# Altium PCB STM32F1_board.PcbDoc
Units mil, origin at the board's own origin, x right, y up, seen from the top; angles counter-clockwise.
Board outline 6000 x 4000 mil, 2 copper layers (Top Layer, Bottom Layer); 43 components, 49 nets, 160 pads, 20 vias.
Unrouted connection lines stored in the file: 82.
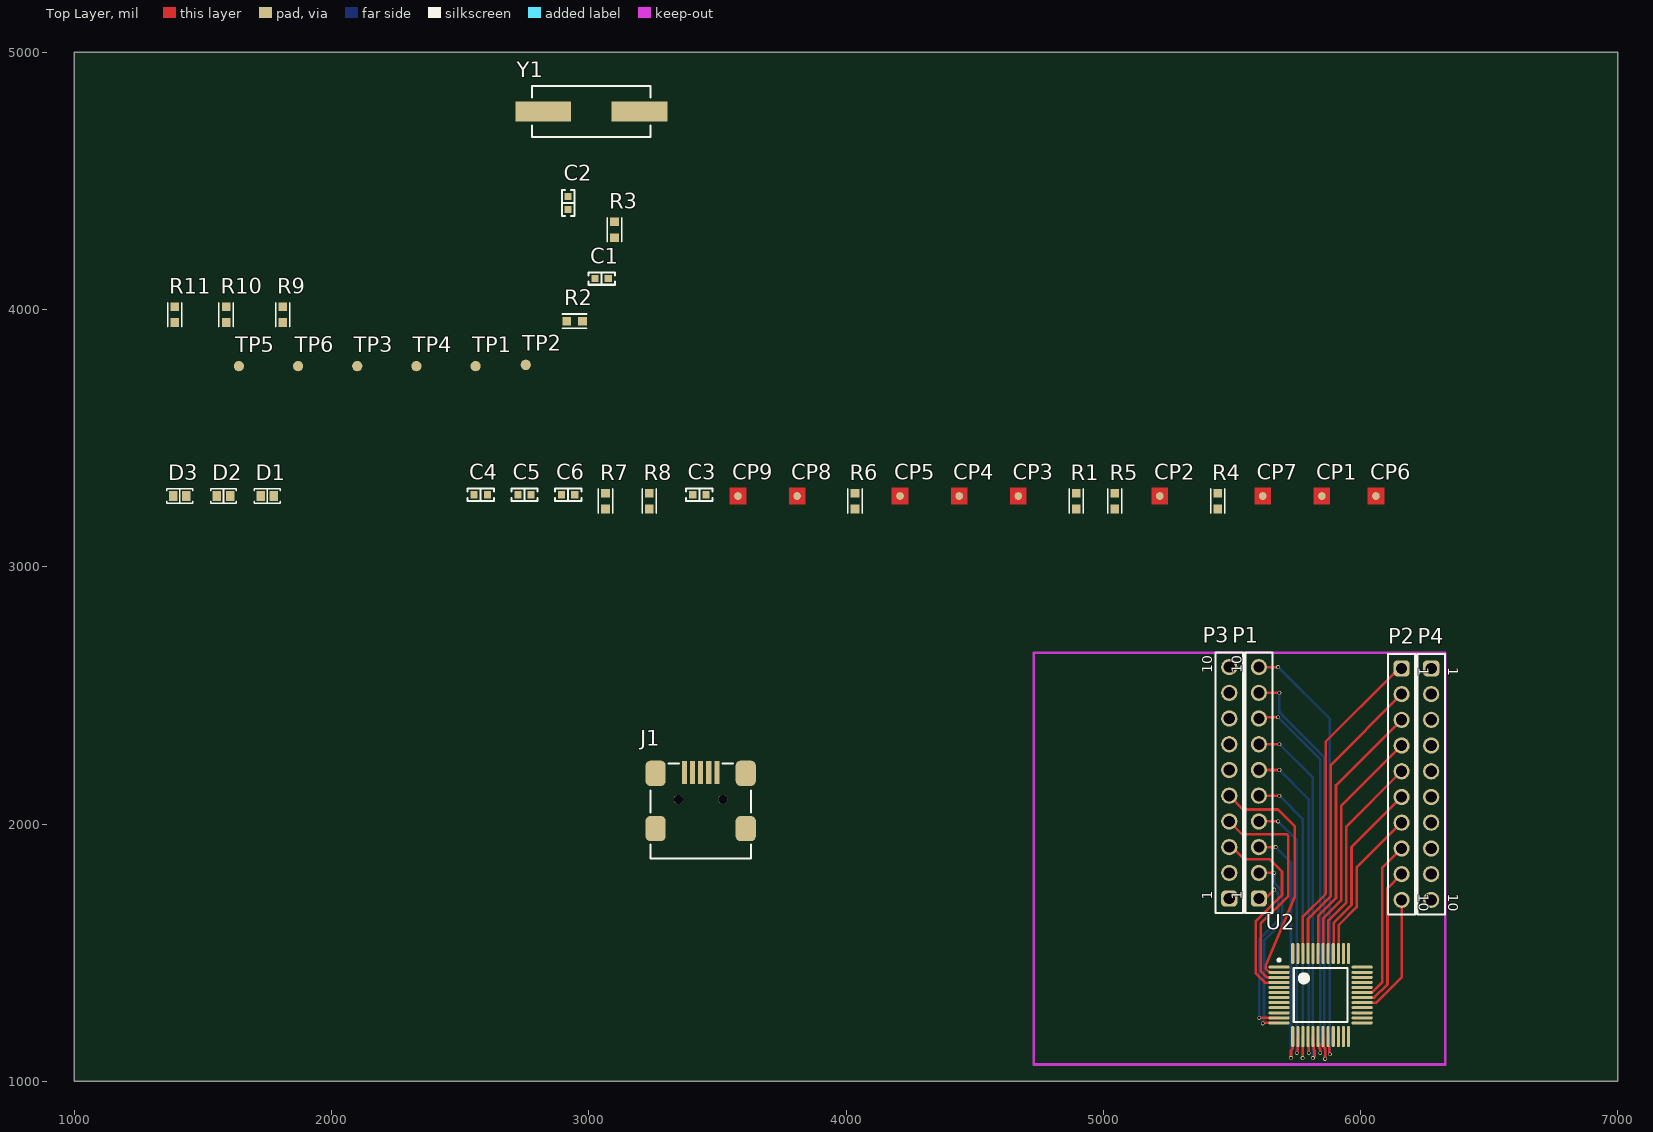
[diagram p0: Top Layer view]
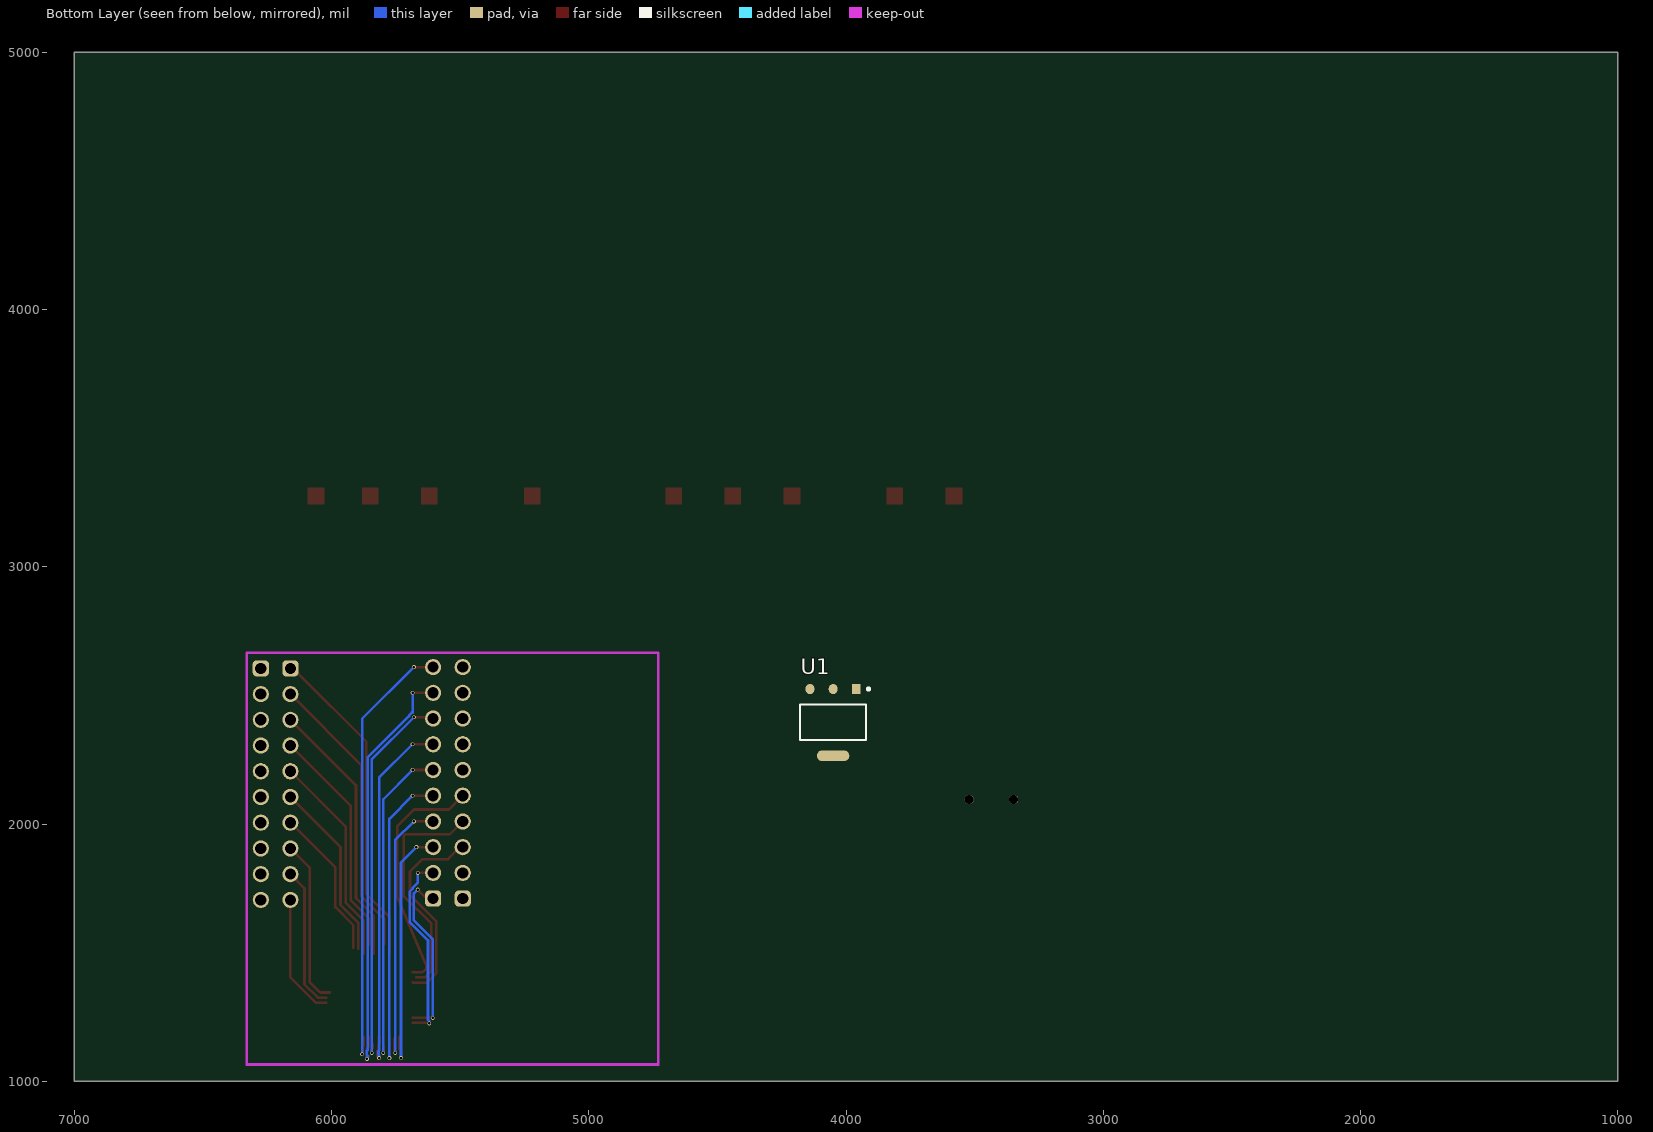
[diagram p1: Bottom Layer view, seen from below]

## Layer stack, top to bottom
Top Solder: solder mask 0.4, Solder Resist, Dk 3.5
Top Layer: signal copper 1.4
Dielectric 1: dielectric 12.6, FR-4, Dk 4.8
Bottom Layer: signal copper 1.4
Bottom Solder: solder mask 0.4, Solder Resist, Dk 3.5

## Board outline
1000,1000 7000,1000 7000,5000 1000,5000

## Design rules (kind name [scope] priority, off if disabled: settings)
Clearance [All] p1: gap=10 ignorepadtopadclearanceinfootprint=FALSE except(0: Arc-Hole Track-Hole SMDPad-Hole THPad-Hole Via-Hole Fill-Hole Poly-Hole Region-Hole Text-Hole; 5: Arc-SMDPad Track-SMDPad SMDPad-SMDPad; 6: Arc-Arc Arc-Track Arc-Via Arc-GluePoints Track-Track Track-Via Track-GluePoints Via-GluePoints)
PolygonConnect [All] p1: connectstyle=Relief reliefconductorwidth=10 reliefentries=4 polygonreliefangle="90 Angle" airgapwidth=10
RoutingVias [All] p1: holewidth=28 width=50 viastyle="Through Hole" minholewidth=28 minwidth=50 maxholewidth=28 maxwidth=50
SolderMaskExpansion [All] p1: expansion=4 istentingtop=FALSE
Width [All] p1: maxlimit=50 minlimit=5 preferedwidth=10 minimp=50.000000 maximp=50.000000 favimp=50.000000
30 further rules are at their usual default settings.

## Components (designator, comment, footprint, x,y, rotation, side; value= is the part's Value field where it differs from the comment)
C1 "Capacitor" "CAP FILM 0603_1608" 3050,4120 r180 top value=10pF
C2 "Capacitor" "CAP FILM 0603_1608" 2920,4414.41 r90 top value=10pF
C3 "=VALUE" "CAP FILM 0603_1608" 3430,3280 r0 top
C4 "10uF" "CAP FILM 0603_1608" 2580,3280 r0 top
C5 "100nF" "CAP FILM 0603_1608" 2750,3280 r0 top
C6 "100nF" "CAP FILM 0603_1608" 2920,3280 r0 top
CP1 "CONNECT_PAD" PAD_SQUARE 5850,3275 r0 top
CP2 "CONNECT_PAD" PAD_SQUARE 5220,3275 r90 top
CP3 "CONNECT_PAD" PAD_SQUARE 4670,3275 r90 top
CP4 "CONNECT_PAD" PAD_SQUARE 4440,3275 r90 top
CP5 "CONNECT_PAD" PAD_SQUARE 4210,3275 r90 top
CP6 "CONNECT_PAD" PAD_SQUARE 6060,3275 r90 top
CP7 "CONNECT_PAD" PAD_SQUARE 5620,3275 r90 top
CP8 "CONNECT_PAD" PAD_SQUARE 3810,3275 r90 top
CP9 "CONNECT_PAD" PAD_SQUARE 3580,3275 r90 top
D1 "=VALUE" "RES 0603_1608" 1750,3275 r0 top
D2 "=VALUE" "RES 0603_1608" 1580,3275 r0 top
D3 "=VALUE" "RES 0603_1608" 1410,3275 r0 top
J1 "USB Micro" "FCI USB 10033526-N3212LF" 3435,2050 r180 top
P1 "61301011121" 61301011121 5605,2160 r90 top
P2 "61301011121" 61301011121 6160,2155 r270 top
P3 "61301011121" 61301011121 5490,2160 r90 top
P4 "61301011121" 61301011121 6275,2155 r270 top
R1 "Resistor" SMD-0603-RES 4895,3255 r0 top value=1K5
R2 "Resistor" SMD-0603-RES 2945,3955 r90 top value=1M
R3 "Resistor" SMD-0603-RES 3100,4310 r0 top value=2K
R4 "10K" SMD-0603-RES 5445,3255 r0 top
R5 "10K" SMD-0603-RES 5045,3255 r0 top
R6 "10K" SMD-0603-RES 4035,3255 r0 top
R7 "100K" SMD-0603-RES 3065,3255 r0 top
R8 "100K" SMD-0603-RES 3235,3255 r0 top
R9 "150R" SMD-0603-RES 1810,3980 r0 top
R10 "470R" SMD-0603-RES 1590,3980 r0 top
R11 "150R" SMD-0603-RES 1390,3980 r0 top
TP1 "=Value" PCBComponent_1 2560,3780 r90 top
TP2 "=Value" PCBComponent_1 2755,3785 r90 top
TP3 "=Value" PCBComponent_1 2100,3780 r90 top
TP4 "=Value" PCBComponent_1 2330,3780 r90 top
TP5 "=Value" PCBComponent_1 1640,3780 r90 top
TP6 "=Value" PCBComponent_1 1870,3780 r90 top
U1 "AMS1117-3.3" FP-AMS1117-IPC_C 4050,2395 r270 bottom
U2 "STM32F103C6T6A" STM-LQFP48_M 5845,1335 r0 top
Y1 "FOXSDLF/080-20" FOX-HC49SDLF_V 3010,4770 r180 top

## Footprints (in the part's own frame and the unit in brackets; to place one, negate y for a bottom-side part, rotate by r counter-clockwise, add the part's x,y. Pads: shape width x height; smd on the part's side, far side on the other; paste and mask are expansions set on the pad)
61301011121 [mm] "Pin Header, pitch 2.54 mm, THT, Vertical, single row, 10p"
  rrect50% 1.6x1.6 hole 1.1: 1(-11.43,0)
  round 1.6 hole 1.1: 2(-8.89,0) 3(-6.35,0) 4(-3.81,0) 5(-1.27,0) 6(1.27,0) 7(3.81,0) 8(6.35,0) 9(8.89,0) 10(11.43,0)
  silkscreen extent -12.85,-1.34 12.85,1.34, body extent -12.7,-1.27 12.7,1.27, height 8.57
"CAP FILM 0603_1608" [mm] "Chip Capacitor, 2-Leads, Body 1.60x0.80mm, IPC Medium Density"
  rect 0.7x0.7 smd: 1(-0.65,0) 2(0.65,0)
  silkscreen extent -1.3,-0.6 1.3,0.6, body extent -0.8,-0.4 0.8,0.4, height 0.7
"FCI USB 10033526-N3212LF" [mm] "USB 2.0 Type B Mini"
  rect 0.5x2.25 smd: 1(1.6,-3.826) 2(0.8,-3.826) 3(0,-3.826) 4(-0.8,-3.826) 5(-1.6,-3.826)
  round 0.9 hole 0.9 unplated: M(-2.2,-1.151) M(2.2,-1.151)
  rrect50% 2x2.5 smd: S(-4.45,1.719) S(-4.45,-3.731) S(4.45,1.719) S(4.45,-3.731)
  silkscreen extent -4.95,-4.71 4.95,4.69, body extent -4.95,-4.7 4.95,4.7, height 4.01
FOX-HC49SDLF_V [mm] "SMD, 2-Leads, Body 5x11.7mm"
  rect 5.5x2 smd: 1(-4.75,0) 2(4.75,0)
  silkscreen extent -5.85,-2.5 5.85,2.5, body extent -6.15,-2.35 6.15,2.35, height 4.34
FP-AMS1117-IPC_C [mm]
  rect 1.004x0.872 smd paste+0 mask+0: 1(-3.295,2.29)
  rrect100% 1.004x0.872 smd paste+0 mask+0: 2(-3.295,0) 3(-3.295,-2.29)
  rrect87% 1.004x3.182 smd paste+0 mask+0: 4(3.295,0)
  silkscreen extent -3.42,-3.25 1.75,3.62, body extent -3.53,-3.25 3.53,3.25, height 1.8
PAD_SQUARE [mil]
  round 30 smd: 1(0,0)
  Top Layer region: -32.5,-32.5 32.5,-32.5 32.5,32.5 -32.5,32.5
PCBComponent_1 [mil]
  round 40 smd: 1(0,0)
"RES 0603_1608" [mm] "Chip Resistor, 2-Leads, Body 1.60x0.80mm, IPC Medium Density"
  rect 0.85x0.95 smd: 1(-0.65,0) 2(0.65,0)
  silkscreen extent -1.27,-0.7 1.27,0.7, body extent -0.8,-0.4 0.8,0.4, height 0.45
SMD-0603-RES [mm]
  rect 0.85x0.85 smd: 1(0,0.775) 2(0,-0.775)
  silkscreen extent -0.7,-1.2 0.7,1.2, body extent -0.4,-0.85 0.4,0.85, height 0.56
STM-LQFP48_M [mm] "QFP, 48-Leads, Body 7x7mm, Pitch 0.5mm, IPC Low Density"
  oval 2.1x0.3 smd: 1(-4.1,2.75) 2(-4.1,2.25) 3(-4.1,1.75) 4(-4.1,1.25) 5(-4.1,0.75) 6(-4.1,0.25) 7(-4.1,-0.25) 8(-4.1,-0.75) 9(-4.1,-1.25) 10(-4.1,-1.75) 11(-4.1,-2.25) 12(-4.1,-2.75) 25(4.1,-2.75) 26(4.1,-2.25) 27(4.1,-1.75) 28(4.1,-1.25) 29(4.1,-0.75) 30(4.1,-0.25) 31(4.1,0.25) 32(4.1,0.75) 33(4.1,1.25) 34(4.1,1.75) 35(4.1,2.25) 36(4.1,2.75)
  oval 0.3x2.1 smd: 13(-2.75,-4.1) 14(-2.25,-4.1) 15(-1.75,-4.1) 16(-1.25,-4.1) 17(-0.75,-4.1) 18(-0.25,-4.1) 19(0.25,-4.1) 20(0.75,-4.1) 21(1.25,-4.1) 22(1.75,-4.1) 23(2.25,-4.1) 24(2.75,-4.1) 37(2.75,4.1) 38(2.25,4.1) 39(1.75,4.1) 40(1.25,4.1) 41(0.75,4.1) 42(0.25,4.1) 43(-0.25,4.1) 44(-0.75,4.1) 45(-1.25,4.1) 46(-1.75,4.1) 47(-2.25,4.1) 48(-2.75,4.1)
  silkscreen extent -4.22,-2.65 2.65,3.57, body extent -3.5,-3.5 3.5,3.5, height 1.6

## Part data
C3 C4 C5 C6: library part Capacitor, "SMT Capacitor"
D1: library part LED, "orange"
D2: library part LED, "green"
D3: library part LED, "blue"
J1: library part "USB 2.0 Type B Micro"
P1 P2 P3 P4: library part CMP-1502-01082-4, Color=Black, Contact Resistance=20mΩ, Current Rating=3A, Flammability Rating="UL94 V-0", Insulation Resistance=1GΩ, Max Operating Temperature=105°C, Min Operating Temperature=-40°C, Operating Supply Voltage=250V, Connector Type="Male Pin", Contact Gender=Male, Contact Material=Copper, Contact Mating Length=5.9944mm, Contact Plating=Gold, Gender=Male, Height=8.74mm, Housing Material=PBT, Lead Pitch=2.54mm, Length=2.54mm, Mount="Through Hole", NexarPartId=18818159, Number of Contacts=10, Number of Pins=10, Number of Positions=10, Number of Rows=1, Orientation=Vertical, Packaging=Bulk, Pitch=2.54mm, REACH SVHC=Unknown, RoHS=Compliant, Termination=Solder, Voltage Rating=250V, Width=25.4mm
R4 R5 R6 R7 R8 R9 R10 R11: library part Resistor, "SMT Resistor"
TP1 TP2 TP3 TP4 TP5 TP6: library part TEST_PAD
U1: library part CMP-209535-000001-1, "LDO Voltage Regulators 1A, 3.3V", Dropout Voltage=1.1V, Manufacturer="Advanced Monolithic Systems", Max Junction Temp=+125°C, Max Power Dissipation=1.2W, Max Supply Voltage=15V, Nominal Supply Current=5mA, Output Current=1A, Output Voltage=3.3V, Package=AMS1117, Temperature="-40°C to +125°C", Temperature Range Low=-40°C, Automotive=No, Category=IC, ComponentLink2Description=Datasheet, ComponentLink2URL=http://www.advanced-monolithic.com/pdf/ds1117.pdf, Device Class L1="Integrated Circuits (ICs)", Device Class L2="Power Management ICs", Device Class L3="Voltage Regulators - Linear", Height=1.8mm, Ipc Land Pattern Name=SOT229P700X180-4, Lead Free=Yes, Manufacturer Part Number=AMS1117-3.3, Number Of Outputs=1, Octopart=https://octopart.com/ams1117-3.3-advanced+monolithic+systems-25899300, Output Type=Fixed, RoHS=TRUE, Standoff Height=0.64mm, Temperature Range High=+125°C
U2: library part CMP-0237-00254-3, "ARM Cortex-M3 32-bit MCU, 32 KB Flash, 10 KB Internal RAM, 37 I/Os, 48-pin LQFP, -40 to 85 degC, Tray", I/Os (High Current)=37, Operating Frequency(F) (Processor speed) (MHz)=72, Supply Voltage(Vcc) min (V)=2, A/D Converter="2x12-bit (10 Channel)", ComponentLink1Description="Manufacturer URL", ComponentLink1URL=http://www.st.com/web/en/home.html, ComponentLink2Description=Datasheet, ComponentLink2URL=http://www.st.com/st-web-ui/static/active/en/resource/technical/document/datasheet/CD00210843.pdf, ComponentLink3Description="Package Specification", ComponentLink3URL=http://www.st.com/st-web-ui/static/active/en/resource/technical/document/datasheet/DM00058181.pdf, Core="ARM Cortex-M3", DatasheetVersion="Rev. 6", FLASH Size (Prog) (kB)=32, Internal RAM Size (kB)=10, Mounting Technology="Surface Mount", PackageDescription="48-Pin Low Profile Quad Flat Package, 7 x 7 mm Body, 0.5 mm Pitch", PackageReference=LQFP48, PackageVersion="Rev. 6, 06/2013", Packing=Tray, PartNumber=STM32F103C6T6A
Y1: library part CMP-2100-03639-1, "Resistance Weld Crystal, 8 MHz, +/- 30 ppm, -20 to 70 degC, 2-Pin SMD, RoHS, Tape and Reel", Case/Package=SMD/SMT, ESR (Equivalent Series Resistance)=80Ohm, Frequency=8MHz, Frequency Stability=50ppm, Frequency Tolerance=30ppm, Load Capacitance=20pF, Manufacturer="FOX Electronics", Max Operating Temperature=70degC, Min Operating Temperature=-20degC, Package Description="2-Pin Surface Mount Device, Body 5 x 11.7 mm", Package Quantity=1000, Package Reference=HC49SDLF, Datasheet URL=http://www.foxonline.com/pdfs/hc49sdlf.pdf, Datasheet Version=42064.0, Depth=5mm, Height=4.5mm, Lead Free=LeadFree, Length=11.7mm, Manufacturer URL=http://www.foxonline.com/, Mount=SurfaceMount, Number of Pins=2, Packaging=TapeandReel, Radiation Hardening=No, REACH SVHC=NoSVHC, RoHSCompliant=True, Series Resistance=80Ohm, Termination=SMD/SMT, Tolerance=50ppm, Width=5mm
C1 C2: SimulationGenericComponent=True
R1 R2 R3: SimulationGenericComponent=True, TC1=0, TC2=0

## Via types
v1: diameter 15, hole 10, Top Layer to Bottom Layer, 20 vias

## Nets (pads, with @x,y where several pads share a name; then routed paths per layer and width w, separated by ;. In a path a pad name is that pad's centre, name@x,y a point inside that pad or via, vN(x,y) a via of type N, cw(c..) or ccw(c..) an arc to the next point about the centre after c; other vN are vias at no path point)
3V3: CP5.1 CP7.1 P3.6 P3.7 P3.8 P3.9 P3.10 R1.2 R4.2 R5.2 R10.1 TP1.1 TP2.1 U1.2 U1.4 U2.1 U2.9 U2.24 U2.36 U2.48
5V: CP6.1 J1.1 P3.1 P3.2 U1.3
ASYNC_SWO: CP4.1 P2.7 U2.39 | length 586.3
  Top Layer w10: U2.39@5915.5,1520 5915.5,1607.22 5985,1676.72 5985,1830 P2.7
AUX_LED: P4.1 R11.1 U2.28
BOOT0: R7.1 U2.44
BOOT1: P1.10 R8.2 U2.20 | length 1735.9
  Top Layer w10: P1.10 v1(5680,2610) ; U2.20 5874.53,1138.1 5878.39,1134.24 5878.39,1105 v1(5880.89,1105)
  Bottom Layer w10: v1(5680,2610) 5880.89,2409.11 v1(5880.89,1105)
D+: J1.3 R1.1 U2.33
D-: J1.2 U2.32
GND: C1.1 C2.1 C4.1 C4.2 C5.1 C5.2 C6.1 C6.2 CP1.1 D1.2 D2.2 D3.2 J1.5 J1.S P4.7 P4.8 P4.9 P4.10 R6.2 TP5.1 TP6.1 U1.1 U2.8 U2.23 U2.35 U2.47
NetC1_2: C1.2 R2.2 U2.5 Y1.2
NetC2_2: C2.2 R3.1 Y1.1
NetC3_1: C3.1 CP8.1
NetD1_1: D1.1 R9.2
NetD2_1: D2.1 R10.2
NetD3_1: D3.1 R11.2
NetP1_1: P1.1 U2.11 | length 686.9
  Top Layer w10: P1.1 5630,1710 v1(5665,1745) ; v1(5606.42,1246.42) U2.11
  Bottom Layer w10: v1(5606.42,1246.42) 5606.42,1551.42 5680,1625 5680,1730 v1(5665,1745)
NetP1_2: P1.2 U2.12 | length 752.9
  Top Layer w10: P1.2 v1(5665,1810) ; v1@5620,1226.73 U2.12
  Bottom Layer w10: v1(5620,1225) 5620,1233.84 5624.92,1238.76 5624.92,1547.29 5696,1618.37 5696,1736.63 5683.5,1749.13 5683.5,1752.66 5665,1771.16 v1(5665,1810)
NetP1_3: P1.3 U2.13 | length 996.2
  Top Layer w10: P1.3 v1(5670,1910) ; v1(5730,1090) 5730,1119.32 5736.39,1125.71 5736.39,1173.24 U2.13
  Bottom Layer w10: v1(5670,1910) 5730,1850 v1(5730,1090)
NetP1_4: P1.4 U2.14 | length 1061.6
  Top Layer w10: P1.4 v1(5680,2010) ; v1(5752.5,1110) 5752.5,1111.35 5756.39,1115.24 U2.14@5756.39,1164.95
  Bottom Layer w10: v1(5680,2010) 5752.5,1937.5 v1(5752.5,1110)
NetP1_5: P1.5 U2.15 | length 1221.6
  Top Layer w10: P1.5 v1(5685,2110) ; v1(5775,1090) 5775,1091.35 5776.39,1092.74 5776.39,1173.3 U2.15
  Bottom Layer w10: v1(5685,2110) 5775,2020 v1(5775,1090)
NetP1_6: P1.6 U2.16 | length 1254.6
  Top Layer w10: P1.6 v1(5685,2210) ; U2.16@5796.39,1135 5798.89,1132.5 v1(5798.89,1110) v1@5797.93,1110.96
  Bottom Layer w10: v1(5685,2210) 5798.89,2096.11 v1(5798.89,1110)
NetP1_7: P1.7 U2.17 | length 1444.5
  Top Layer w10: P1.7 v1(5685,2310) ; v1(5815,1090) 5815,1091.35 5821.39,1097.74 5821.39,1119.32 5818.89,1121.82 5818.89,1140.78 5815.47,1144.2 U2.17
  Bottom Layer w10: v1(5685,2310) 5815,2180 5815,1120.05 5817.39,1117.66 5817.39,1102.34 5815,1099.95 v1(5815,1090)
NetP1_8: P1.8 U2.18 | length 1486.2
  Top Layer w10: P1.8 5610,2415 v1(5680,2415) ; U2.18@5838.94,1144.2 5838.94,1131.56 5838.94,1128.44 5842.93,1124.44 5842.93,1110.96 v1(5843.89,1110)
  Bottom Layer w10: v1(5680,2415) 5843.89,2251.11 v1(5843.89,1110)
NetP1_9: P1.9 U2.19 | length 1672.5
  Top Layer w10: P1.9 v1(5685,2510) ; U2.19 5854.84,1150.92 5854.94,1150.82 5854.94,1135.06 5862.39,1127.61 v1(5862.39,1086.65)
  Bottom Layer w10: v1(5685,2510) 5685,2433.5 5687.66,2433.5 5698.5,2422.66 5698.5,2419.13 5859.89,2257.74 5859.89,1120.16 5862.39,1117.66 5862.39,1102.34 5857.52,1097.48 5862.39,1092.61 v1(5862.39,1086.65)
NetP2_1: P2.1 U2.46 | length 1274.4
  Top Layer w10: U2.46 5776.1,1555.62 5775,1556.72 5775,1638.28 5865,1728.28 5865,2320 6130.14,2585.14 6140.14,2585.14 P2.1
NetP2_2: P2.2 U2.45 | length 1120.7
  Top Layer w10: U2.45@5796.1,1535 5796.1,1631.1 5885,1720 5885,2230 P2.2
NetP2_3: P2.3 U2.43 | length 1043.1
  Top Layer w10: U2.43 5835.16,1641.73 5905,1711.57 5905,2150 P2.3
NetP2_4: P2.4 U2.42 | length 900.9
  Top Layer w10: U2.42@5855.19,1530.32 5855.19,1633.47 5925,1703.28 5925,2070 P2.4
NetP2_5: P2.5 U2.41 | length 826.8
  Top Layer w10: U2.41 5875.36,1497.25 5875.36,1527.53 5875.5,1527.67 5875.5,1625.5 5945,1695 5945,1990 P2.5
NetP2_6: P2.6 U2.40 | length 698.7
  Top Layer w10: U2.40@5895.36,1515.95 5895.36,1519.25 5895.5,1519.39 5895.5,1615.5 5965,1685 5965,1910 P2.6
NetP2_8: P2.8 U2.31 | length 646.2
  Top Layer w10: U2.31 6042.34,1344.84 6046.12,1348.62 6048.44,1348.62 6085,1385.18 6085,1830 P2.8
NetP2_9: P2.9 U2.30 | length 557.4
  Top Layer w10: U2.30@6020,1324.84 6052.94,1324.84 6105,1376.9 6105,1750 P2.9
NetP2_10: P2.10 U2.29 | length 482.3
  Top Layer w10: U2.29@6020,1304.84 6061.23,1304.84 6160,1403.61 P2.10
NetP3_3: P3.3 U2.4 | length 788.5
  Top Layer w10: P3.3 5500,1910 5546.5,1863.5 5580.74,1863.5 5646.5,1863.5 5695,1815 5695,1723.54 5592.24,1620.79 5592.24,1420.11 5628.77,1383.58 5682.95,1383.58 U2.4
NetP3_4: P3.4 U2.3 | length 891.3
  Top Layer w10: P3.4 5540.44,1959.56 5714.14,1959.56 5720,1953.7 5720,1720.26 5612.24,1612.5 5612.24,1428.4 5637.06,1403.58 U2.3@5670,1403.58
NetP3_5: P3.5 U2.2 | length 937.3
  Top Layer w10: P3.5 5543.5,2056.5 5600,2056.5 5678.5,2056.5 5745,1990 5745,1716.97 5632.24,1449.86 5632.24,1436.68 5641.56,1427.36 cw(c5640.25,1417.45) 5648.15,1423.58 U2.2
NetP4_2: P4.2 U2.27
NetP4_3: P4.3 U2.26
NetP4_4: P4.4 U2.25
NetP4_5: P4.5 U2.22
NetP4_6: P4.6 U2.21
NetR2_1: R2.1 R3.2 U2.6
NetR7_2: R7.2 TP3.1
NetR8_1: R8.1 TP4.1
NetU2_10: U2.10
NetU2_38: U2.38
RESET: C3.2 CP9.1 R6.1 U2.7
SWCLK: CP3.1 R5.1 U2.37
SWDIO: CP2.1 R4.1 R9.1 U2.34
pads on no net: J1.4 J1.M

## Keep-outs
Keep-Out Layer:
  lines w10: 4730,1065 6330,1065 6330,2665 4730,2665 4730,1065

## Text inside footprints (layer, text, board x,y; h text height)
P1: Top Overlay "10" at 5538.07,2585.2 h40 r90; Top Overlay "1" at 5538.07,1705.28 h40 r90
P2: Top Overlay "1" at 6226.93,2609.72 h40 r270; Top Overlay "10" at 6226.93,1729.8 h40 r270
P3: Top Overlay "1" at 5423.07,1705.28 h40 r90; Top Overlay "10" at 5423.07,2585.2 h40 r90
P4: Top Overlay "1" at 6341.93,2609.72 h40 r270; Top Overlay "10" at 6341.93,1729.8 h40 r270